# Altium PCB BMSPowerDistribution.PcbDoc (part 6 of 6)
Units mil, origin at the board's own origin, x right, y up, seen from the top; angles counter-clockwise.
Board outline 5328.74 x 5315 mil, 4 copper layers (Top Layer, Layer 1, Layer 2, Bottom Layer), stack 24.6 mil thick; 321 components, 209 nets, 1075 pads, 489 vias.
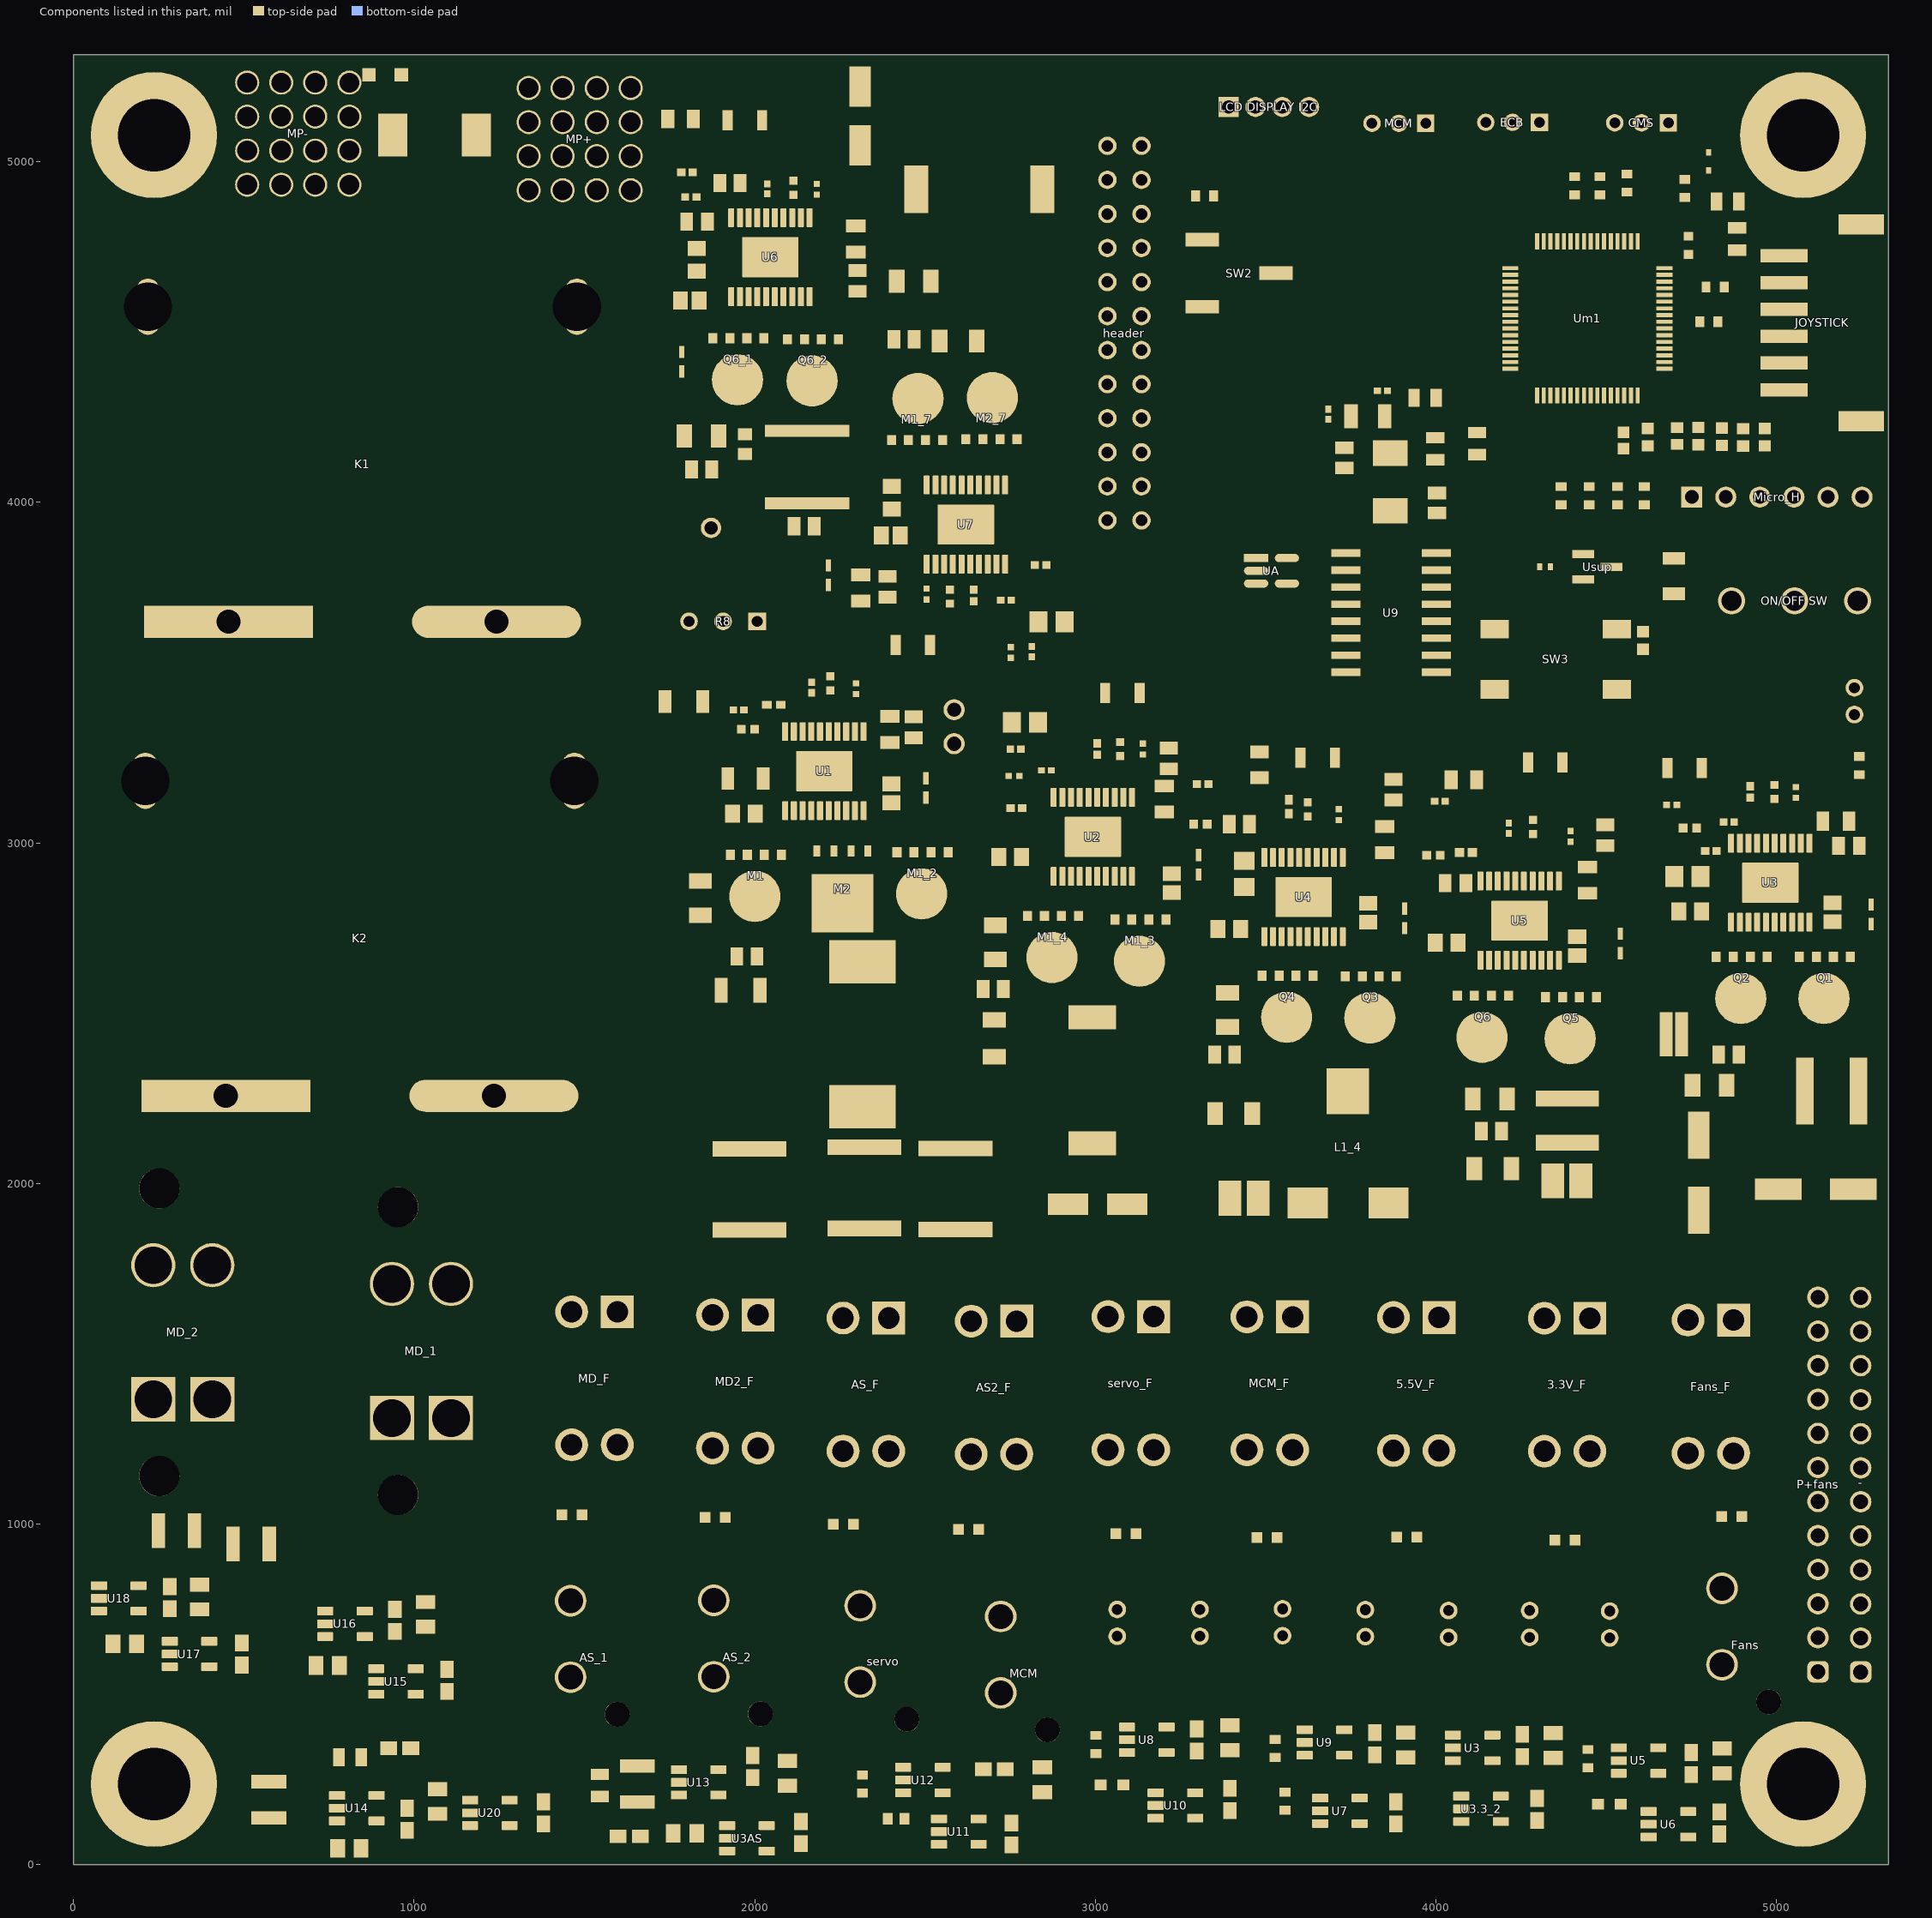
[diagram p7: the components of this part, seen from the top]

## Silkscreen, mask and mechanical layers (free items; w line width, h text height) (continued)
Bottom Overlay:
  drawing of 18 lines, arcs and shapes, not listed
  text "ENGG4000 - Team 2" at 4939.3,4721.55 h59.06
  text "Quynh Nguyen" at 4939.3,4587.68 h59.06
  text "Eke Kalu" at 4939.16,4491.84 h59.06
  text "Owen Fletcher" at 4936.49,4392.2 h59.06
  text "Anh Albert Nguyen" at 4931.16,4297.52 h59.06

## Text inside footprints (layer, text, board x,y; h text height)
U9: Mechanical 13 "*" at 3761.47,3829.68 h50